# EAGLE board TrunkBus9 (EAGLE 7.5.0)
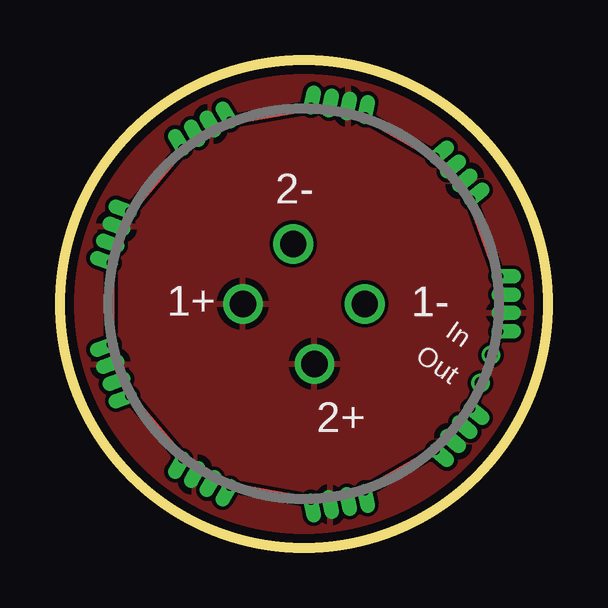
[diagram p0: board, top side]
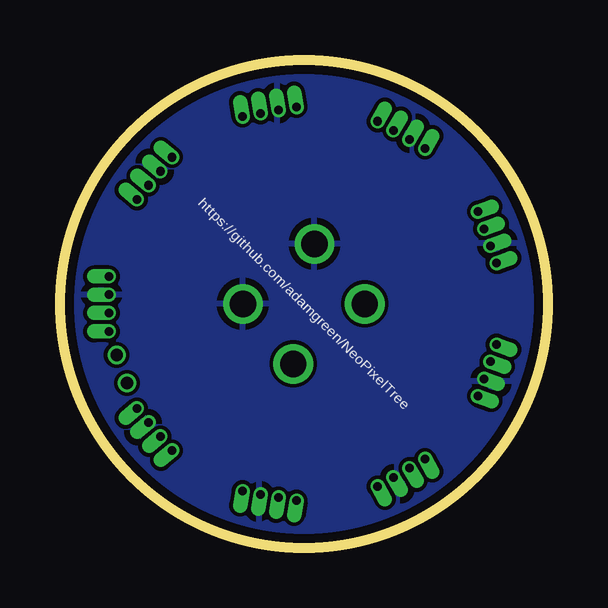
[diagram p1: board, bottom side, seen from below]

Size 20.32 x 20.32 mm. Coordinates in mm from the lower left corner, seen from the top.
Outline: circle at 10.16,10.16 radius 10.16
Copper layers (1*16): Top 0.035559375mm / dielectric 1.6mm / Bottom 0.035559375mm
Design rules "oshpark-2layer": minimum track width 6mil, minimum drill 10mil, track to track 6mil, track to pad 6mil, pad to pad 6mil, via to via 6mil, smd to smd 6mil, copper to edge 15mil, drill to drill 6mil, minimum pad ring 5mil, minimum via ring 5mil, stop-mask expansion 2.5mil, vias tented up to drill 0mil, thermal gap 10mil

## Footprints (pad centres in the part's own frame; a part is rotated, then mirrored left to right if it is on the bottom)
NEOPIXEL_TRUNK_2WIRE = drill 1.1: P$1 -2.54,0; P$2 2.54,0
NEOPIXEL_BRANCH_4WIRE = drill 0.356 pad 0.61 offset: P$1 -0.381,0; P$2 0.381,0; P$3 -1.143,0; P$4 1.143,0
NEOPIXEL_26AWG_HOLE = drill 0.508: P$1 0,0

## Placement (x,y rotation side)
E$1  [NEOPIXEL_TRUNK_2WIRE]  10.16,10.16 0 top
E$2  [NEOPIXEL_BRANCH_4WIRE]  18.29,10.16 90 top
E$3  [NEOPIXEL_BRANCH_4WIRE]  16.38,15.39 130 top
E$4  [NEOPIXEL_BRANCH_4WIRE]  11.58,18.16 170 top
E$5  [NEOPIXEL_BRANCH_4WIRE]  6.1,17.2 210 top
E$6  [NEOPIXEL_BRANCH_4WIRE]  2.51,12.93 250 top
E$7  [NEOPIXEL_BRANCH_4WIRE]  2.51,7.39 290 top
E$8  [NEOPIXEL_BRANCH_4WIRE]  6.1,3.12 330 top
E$9  [NEOPIXEL_BRANCH_4WIRE]  11.58,2.16 10 top
E$10  [NEOPIXEL_BRANCH_4WIRE]  16.38,4.93 50 top
E$11  [NEOPIXEL_TRUNK_2WIRE]  10.16,10.16 100 top
E$12  [NEOPIXEL_26AWG_HOLE]  17.53,6.86 0 top
E$13  [NEOPIXEL_26AWG_HOLE]  17.96,8.03 0 top

## Library data of the parts
E$1-E$13 = adam_custom

## Nets
5V: E$1.P$1 E$2.P$1 E$3.P$1 E$4.P$1 E$5.P$1 E$6.P$1 E$7.P$1 E$8.P$1 E$9.P$1 E$10.P$1 E$11.P$1
GND: E$1.P$2 E$2.P$2 E$3.P$2 E$4.P$2 E$5.P$2 E$6.P$2 E$7.P$2 E$8.P$2 E$9.P$2 E$10.P$2 E$11.P$2
S$1: E$8.P$4 E$9.P$3
S$2: E$9.P$4 E$10.P$3
S$3: E$10.P$4 E$12.P$1
S$4: E$2.P$4 E$3.P$3
S$5: E$3.P$4 E$4.P$3
S$6: E$4.P$4 E$5.P$3
S$7: E$5.P$4 E$6.P$3
S$8: E$6.P$4 E$7.P$3
S$9: E$2.P$3 E$13.P$1
S$10: E$7.P$4 E$8.P$3

## Tracks (layer width: path | path; a pad name or v marks a point on that pad's centre or on a via)
5V
  pour Top: 10.16,20.32 arc-90 20.32,10.16 arc-90 10.16,0 arc-90 0,10.16 arc-90
GND
  pour Bottom: 10.16,20.32 arc-90 20.32,10.16 arc-90 10.16,0 arc-90 0,10.16 arc-90
S$1
  Top 0.305: E$8.P$4 E$9.P$3
S$2
  Top 0.305: E$9.P$4 E$10.P$3
S$3
  Top 0.305: E$10.P$4 E$12.P$1
S$4
  Top 0.305: E$2.P$4 E$3.P$3
S$5
  Top 0.305: E$3.P$4 E$4.P$3
S$6
  Top 0.305: E$4.P$4 E$5.P$3
S$7
  Top 0.305: E$5.P$4 E$6.P$3
S$8
  Top 0.305: E$6.P$4 E$7.P$3
S$9
  Top 0.305: E$13.P$1 E$2.P$3
S$10
  Top 0.305: E$7.P$4 E$8.P$3

## Text on the board
tPlace: 2- | 1+ | 1- | In | Out | 2+
bPlace: https://github.com/adamgreen/NeoPixelTree